# Altium PCB XMOS_MAX3420E.PcbDoc
Units mm, origin at the board's own origin, x right, y up, seen from the top; angles counter-clockwise.
Board outline 25 x 35 mm, 2 copper layers (Top Layer, Bottom Layer); 17 components, 25 nets, 91 pads, 20 vias.
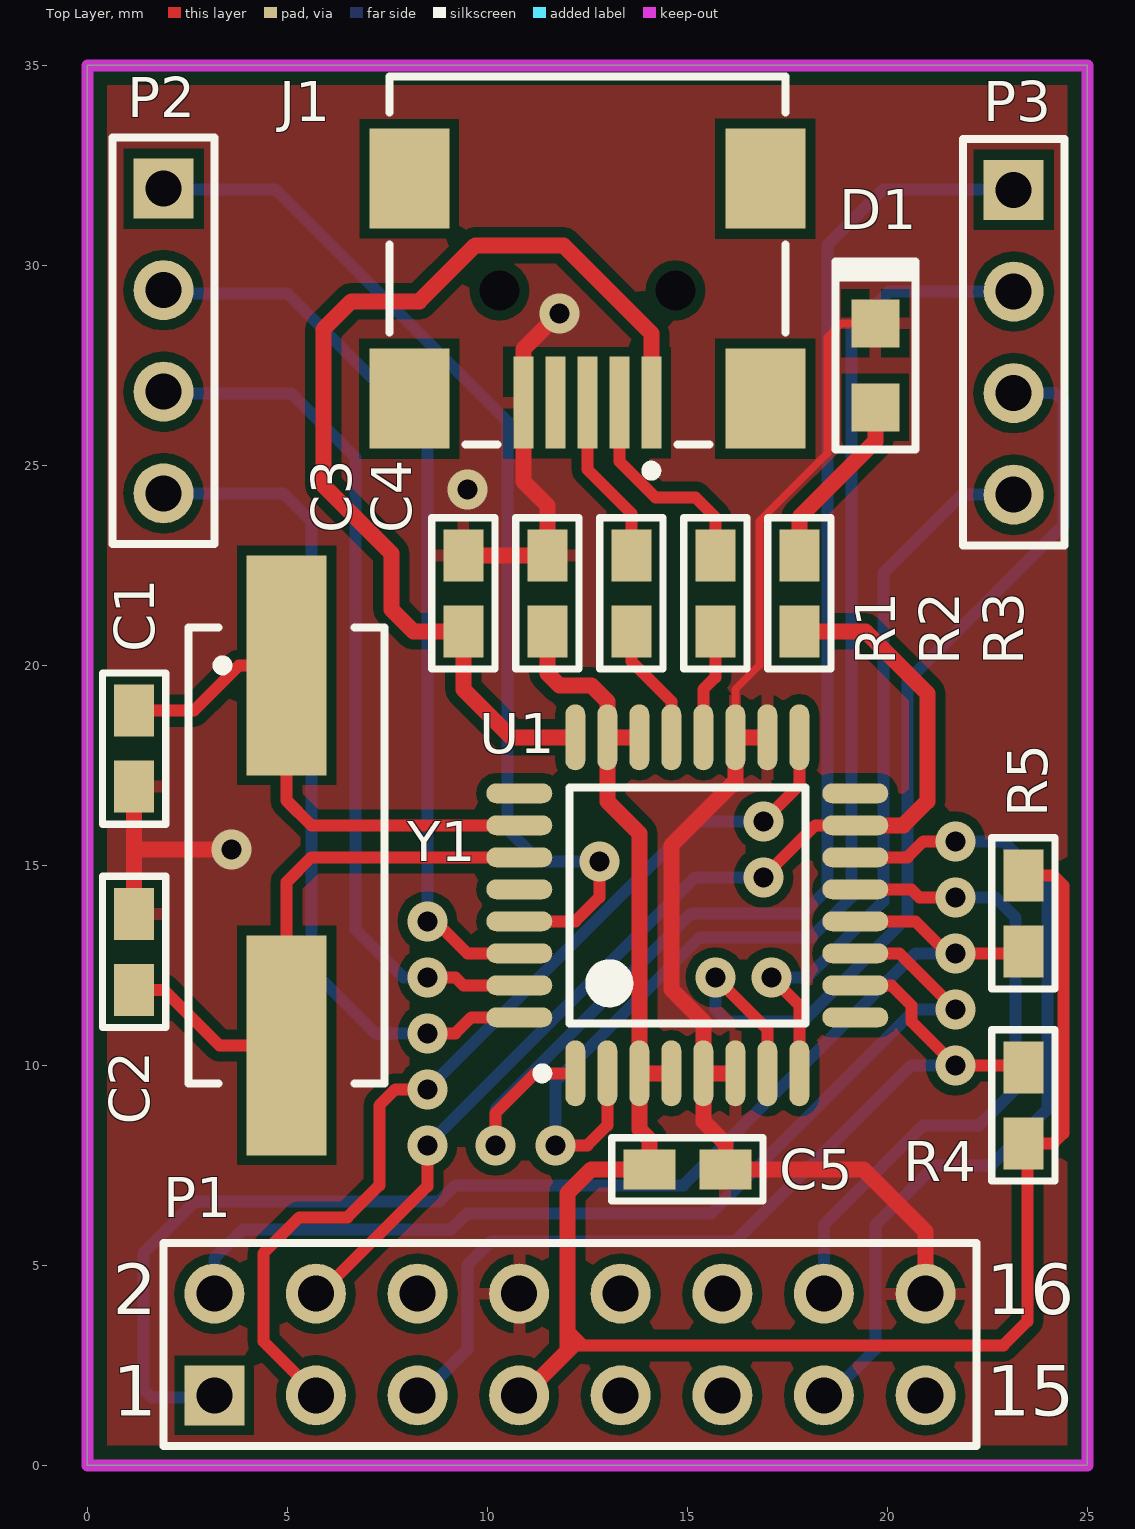
[diagram p0: Top Layer view]
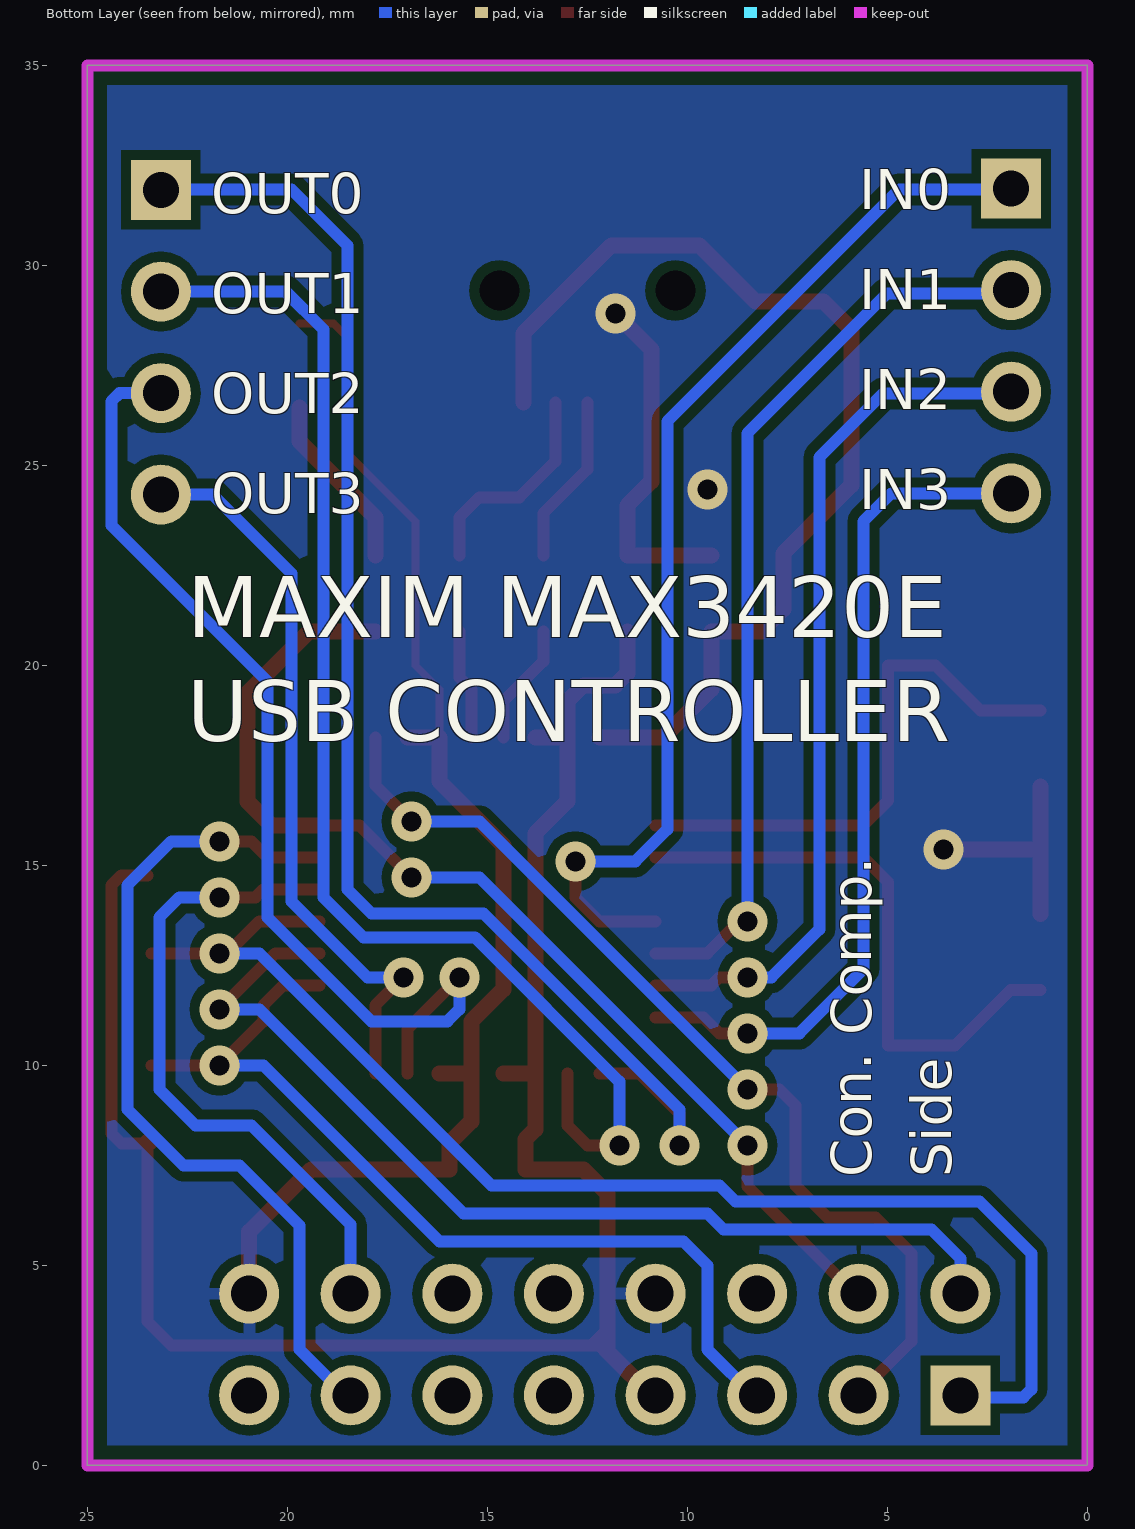
[diagram p1: Bottom Layer view, seen from below]
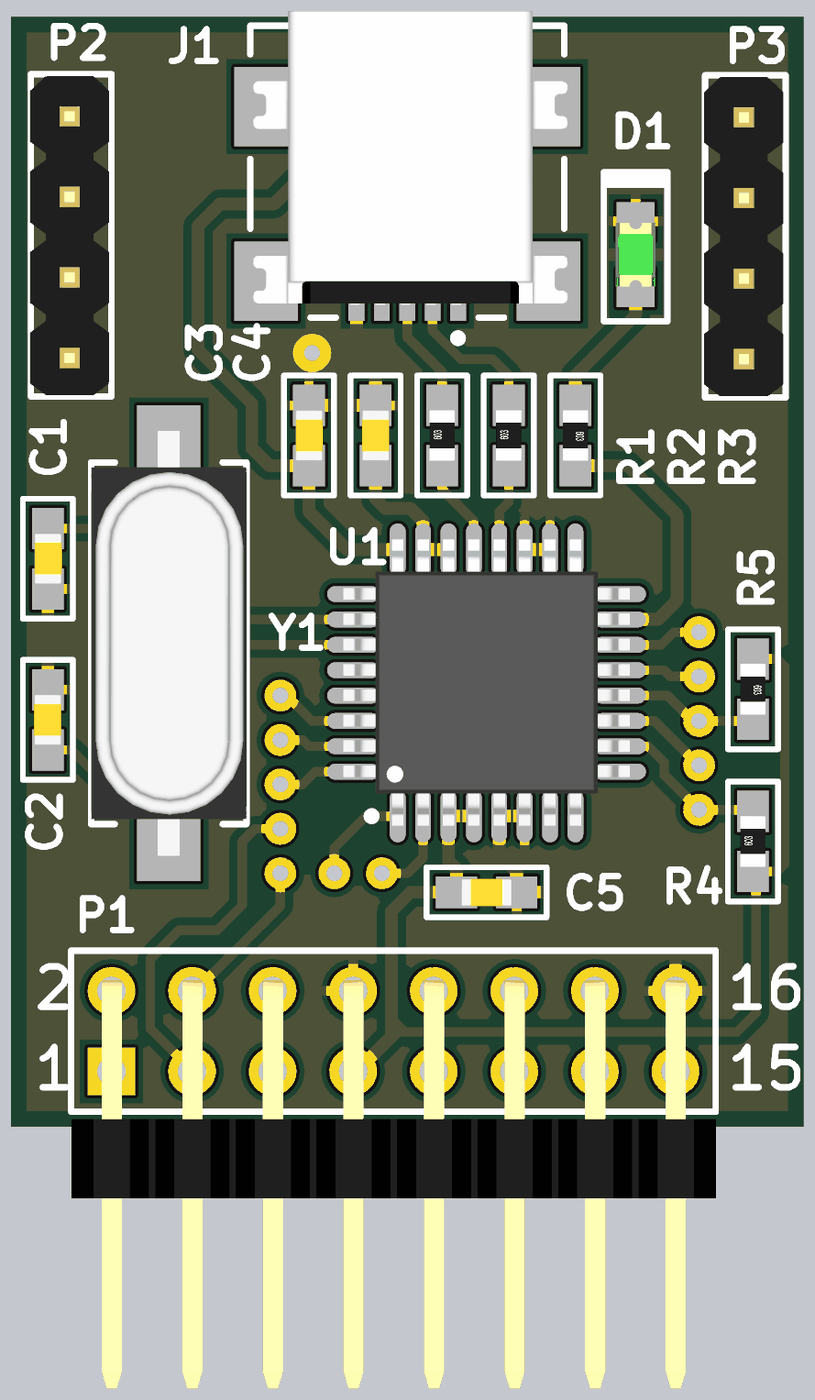
[diagram p2: 3D render of the assembled board from above, using the file's embedded part models]

## Layer stack, top to bottom
Top Layer: signal copper 0.0356
Dielectric: dielectric 0.32, FR-4, Dk 4.8
Bottom Layer: signal copper 0.0356

## Board outline
0,0 25,0 25,35 0,35

## Design rules (kind name [scope] priority, off if disabled: settings)
Clearance Clearance_1 [InPolygon] p1: gap=0.25
Clearance [All] p2: gap=0.2
HoleSize [All] p1: absolutevalues=TRUE maxlimit=2.54 minlimit=0.3 maxpercent=80.000 minpercent=20.000
MinimumSolderMaskSliver [All] p1: minsoldermaskwidth=0.1
PolygonConnect PolygonConnect_4 [IsVia vs IsNamedPolygon('Bottom Layer-GND')] p1: connectstyle=Direct reliefconductorwidth=0.254 reliefentries=4 polygonreliefangle="90 Angle"
PolygonConnect PolygonConnect_3 [IsPad vs IsNamedPolygon('Bottom Layer-GND')] p2: connectstyle=Relief reliefconductorwidth=0.3 reliefentries=4 polygonreliefangle="90 Angle"
PolygonConnect PolygonConnect_2 [IsVia vs IsNamedPolygon('Top Layer-GND')] p3: connectstyle=Direct reliefconductorwidth=0.254 reliefentries=4 polygonreliefangle="90 Angle"
PolygonConnect PolygonConnect_1 [IsPad vs IsNamedPolygon('Top Layer-GND')] p4: connectstyle=Relief reliefconductorwidth=0.3 reliefentries=4 polygonreliefangle="90 Angle"
PolygonConnect [All] p5: connectstyle=Relief reliefconductorwidth=0.254 reliefentries=4 polygonreliefangle="90 Angle"
RoomDefinition XMOS_MAX3420E [InComponentClass('XMOS_MAX3420E')] p1 off: confinementstyle=ConfineIn formatcopy=TRUE lockcomponents=FALSE outline 49.784,0.635 164.084,0.635 164.084,27.686 49.784,27.686
RoutingVias [All] p1: holewidth=0.5 width=1 viastyle="Through Hole" minholewidth=0.5 minwidth=1 maxholewidth=0.711 maxwidth=1.27
SilkToSilkClearance [All] p1: silktosilkclearance=0.1
SilkscreenOverComponentPads [All] p1: minsilkscreentomaskgap=0
SolderMaskExpansion [All] p1: expansion=0.102
Width [All] p1: maxlimit=0.5 minlimit=0.2 preferedwidth=0.2
24 further rules are at their usual default settings.

## Components (designator, comment, footprint, x,y, rotation, side; value= is the part's Value field where it differs from the comment)
C1 "Cap" 1608[0603]_CAP 1.17,17.915 r270 top
C2 "Cap" 1608[0603]_CAP 1.17,12.835 r90 top
C3 "Cap" 1608[0603]_CAP 9.4,21.8 r270 top
C4 "Cap" 1608[0603]_CAP 11.5,21.8 r270 top
C5 "Cap" 1608[0603]_CAP 15,7.4 r180 top
D1 "LED3" 2012[0805]_LED 19.7,27.5 r90 top
J1 "LUMBERG MINI-USB-B" "LUMBERG mini USB-B" 12.5,34.417 r90 top
P1 "Header 8X2" HDR2X8 3.175,1.751 r0 top
P2 "Header 4" HDR1X4 1.905,31.92 r270 top
P3 "Header 4" HDR1X4 23.16,31.885 r270 top
R1 "Res" 1608[0603]_RES 13.6,21.8 r90 top
R2 "Res" 1608[0603]_RES 15.7,21.8 r90 top
R3 "Res" 1608[0603]_RES 17.8,21.8 r270 top
R4 "Res" 1608[0603]_RES 23.4,9 r90 top
R5 "Res" 1608[0603]_RES 23.4,13.8 r270 top
U1 "MAX3420E" TQFP80P900X900-32N 15,14 r90 top
Y1 "XTAL" HC49/4H_SMX 4.98,15.248 r270 top

## Footprints (in the part's own frame and the unit in brackets; to place one, negate y for a bottom-side part, rotate by r counter-clockwise, add the part's x,y. Pads: shape width x height; smd on the part's side, far side on the other; paste and mask are expansions set on the pad)
1608[0603]_CAP [mm] "Chip Resistor / Capacitor; Body 1.6 x 0.8 mm (LxW typ) Handsoldering optimized"
  rect 1.3x1 smd: 1(-0.95,0) 2(0.95,0)
  silkscreen extent -1.89,-0.79 1.89,0.79, body extent -0.8,-0.43 0.8,0.44, height 0.8
1608[0603]_RES [mm] "Chip Resistor / Capacitor; Body 1.6 x 0.8 mm (LxW typ) Handsoldering optimized"
  rect 1.3x1 smd: 1(-0.95,0) 2(0.95,0)
  silkscreen extent -1.89,-0.79 1.89,0.79, body extent -0.8,-0.4 0.8,0.4, height 0.3
2012[0805]_LED [mm] "Kingbright KPHCM-2012SGC-T"
  rect 1.2x1.2 smd: 1(-1.05,0) 2(1.05,0)
  silkscreen extent -2.1,-1 2.6,1, body extent -1.01,-0.62 1.01,0.63, height 1.1
HC49/4H_SMX [mm] "Quartz Crystal, SM; Body 13.4 (inc. leads) x 4.9 mm (LxW max)"
  rect 5.5x2 smd: 1(-4.75,0) 2(4.75,0)
  silkscreen extent -5.7,-2.45 5.7,2.45, body extent -6.7,-2.45 6.7,2.45, height 5.08
HDR1X4 [mm] "Connector; Header; 4 Position"
  rect 1.5x1.5 hole 0.9: 1(0,0)
  round 1.5 hole 0.9: 2(2.54,0) 3(5.08,0) 4(7.62,0)
  silkscreen extent -1.27,-1.27 8.89,1.27, body extent -1.21,-1.3 8.85,1.2, height 8.2
HDR2X8 [mm] "Connector; Header; 8x2 Position"
  rect 1.5x1.5 hole 0.9: 1(0,0)
  round 1.5 hole 0.9: 2(0,2.54) 3(2.54,0) 4(2.54,2.54) 5(5.08,0) 6(5.08,2.54) 7(7.62,0) 8(7.62,2.54) 9(10.16,0) 10(10.16,2.54) 11(12.7,0) 12(12.7,2.54) 13(15.24,0) 14(15.24,2.54) 15(17.78,0) 16(17.78,2.54)
  silkscreen extent -1.27,-1.27 19.05,3.81, body extent -1.26,-10 19.06,2.88, height 2.5
"LUMBERG mini USB-B" [mm] "Connector; USB2.0, Type B, SM; 5 Position; Right Angle"
  rect 2.3x0.5 smd: 1(-7.85,-1.6) 2(-7.85,-0.8) 3(-7.85,0) 4(-7.85,0.8) 5(-7.85,1.6)
  rect 2.5x2 smd: 6(-7.75,4.45) 7(-2.25,4.45) 8(-7.75,-4.45) 9(-2.25,-4.45)
  round 0.6 hole 1 unplated: MH1(-5.05,2.2) MH2(-5.05,-2.2)
  silkscreen extent -9.67,-4.95 0.3,4.95, body extent -8.5,-5.05 0.75,4.85, height 3.93
TQFP80P900X900-32N [mm] "Thin QFP, 32-Leads, Body 7x7mm, Pitch 0.8mm, IPC Medium Density"
  oval 1.65x0.5 smd: 1(-4.2,2.8) 2(-4.2,2) 3(-4.2,1.2) 4(-4.2,0.4) 5(-4.2,-0.4) 6(-4.2,-1.2) 7(-4.2,-2) 8(-4.2,-2.8) 17(4.2,-2.8) 18(4.2,-2) 19(4.2,-1.2) 20(4.2,-0.4) 21(4.2,0.4) 22(4.2,1.2) 23(4.2,2) 24(4.2,2.8)
  oval 0.5x1.65 smd: 9(-2.8,-4.2) 10(-2,-4.2) 11(-1.2,-4.2) 12(-0.4,-4.2) 13(0.4,-4.2) 14(1.2,-4.2) 15(2,-4.2) 16(2.8,-4.2) 25(2.8,4.2) 26(2,4.2) 27(1.2,4.2) 28(0.4,4.2) 29(-0.4,4.2) 30(-1.2,4.2) 31(-2,4.2) 32(-2.8,4.2)
  silkscreen extent -4.32,-2.95 2.95,3.75, body extent -4.5,-4.51 4.52,4.51, height 1.35

## Part data
C1 C2 C3 C4 C5: "Capacitor"
D1: "SMD LED 0805"
J1: "USB 2.0, Right Angle, SMT, A Type, Receptacle, 5 Position, Black"
P1: "Header, 8-Pin, Dual row"
P2 P3: "Header, 4-Pin"
R1 R2 R3 R4 R5: "Resistor"
U1: "USB Controller SPI Interface"
Y1: "Crystal Oscillator"

## Via types
v1: diameter 1, hole 0.5, Top Layer to Bottom Layer, 20 vias

## Nets (pads, with @x,y where several pads share a name; then routed paths per layer and width w, separated by ;. In a path a pad name is that pad's centre, name@x,y a point inside that pad or via, vN(x,y) a via of type N, cw(c..) or ccw(c..) an arc to the next point about the centre after c; other vN are vias at no path point)
D33: C4.2 C5.2 P1.7 R4.1 R5.1 U1.3 U1.4 U1.22 U1.23 | length 49.8
  Top Layer w0.3: 12,3.4 12.4,3 ; 12.144,3 12.4,3 ; R4.1 R4.1@23.5,8.05 ; R5.1@23.5,14.75 24.15,14.75 24.4,14.5 24.4,8.3 24.15,8.05 R4.1@23.5,8.05 ; R4.1@23.55,8.1 23.5,8.15 R4.1@23.5,8.05 ; 12.4,3 22.9,3 23.5,3.6 R4.1@23.5,8.05
  Top Layer w0.4: P1.7@10.795,1.651 12,2.856 ; C4.2 11.5,19.8 11.8,19.5 12.6,19.5 13,19.1 U1.23 ; 12.144,3 12,2.856 ; U1.22 U1.23 ; U1.4 U1.3 ; 12,2.856 12,3.4 12,6.8 12.6,7.4 C5.2 14.05,8.15 13.8,8.4 U1.3 ; U1.23 13,16.6 13.8,15.8 U1.3
GND: C1.2 C2.2 C3.1 C4.1 C5.1 D1.2 J1.5 P1.8 P1.16 U1.5 U1.6 U1.18 U1.19 | length 47.5
  Top Layer w0.2: U1.19 16.2,19.4 16.8,20 16.8,23.6 18.5,25.3 18.5,28.2 18.85,28.55 D1.2
  Top Layer w0.4: C2.2 1.17,15.4 ; C1.2 1.17,15.4 ; v1(3.6,15.4) 1.17,15.4 ; C3.1 C4.1 11.5,24 10.9,24.6 J1.5 10.9,27.9 v1(11.8,28.8) ; U1.6 U1.5 ; U1.18 U1.19 16.2,17.1 14.6,15.5 14.6,11.9 15.4,11.1 U1.5 ; P1.16 20.955,5.845 19.4,7.4 C5.1 15.95,8.05 15.4,8.6 U1.5
  other v1: 9.5,24.4
GPX: P1.4 R3.2 U1.15 | length 27.6
  Top Layer w0.3: P1.4@5.715,4.191 8.5,6.976 v1(8.5,8) ; v1@16.95,14.65 16.95,14.75 18.2,16 U1.15
  Top Layer w0.4: R3.2 19.45,20.85 21,19.3 21,16.6 20.4,16 U1.15
  Bottom Layer w0.3: v1(8.5,8) 15.2,14.7 16.7,14.7 16.8,14.6 v1@16.9,14.6
  other v1: 16.9,14.7
IN0: P2.1 U1.29 | length 27
  Top Layer w0.3: U1.29 12.2,13.6 12.8,14.2 v1(12.8,15.1)
  Bottom Layer w0.3: P2.1@1.905,31.9 4.7,31.9 10.5,26.1 10.5,15.9 11.3,15.1 v1(12.8,15.1)
IN1: P2.2 U1.30 | length 22.9
  Top Layer w0.3: v1(8.5,13.6) 8.7,13.6 9.5,12.8 U1.30
  Bottom Layer w0.3: P2.2@1.905,29.3 5,29.3 8.5,25.8 v1(8.5,13.6)
IN2: P2.3 U1.31 | length 22
  Top Layer w0.3: v1(8.5,12.2) 9.2,12.2 9.4,12 U1.31
  Bottom Layer w0.3: P2.3@1.905,26.9 2.005,26.8 5.1,26.8 6.7,25.2 6.7,13.4 7.9,12.2 v1(8.5,12.2)
IN3: P2.4 U1.32 | length 21.2
  Top Layer w0.3: v1(8.5,10.8) 9.2,10.8 9.6,11.2 U1.32
  Bottom Layer w0.3: P2.4 4.9,24.3 5.6,23.6 5.6,12.4 7.2,10.8 v1(8.5,10.8)
INT: P1.3 U1.17 | length 24.8
  Top Layer w0.3: P1.3@5.715,1.651 5.715,1.785 4.4,3.1 4.4,5.3 5.3,6.2 6.5,6.2 7.3,7 7.3,9 7.7,9.4 v1(8.5,9.4) ; v1(16.9,16.1) 17.8,17 U1.17
  Bottom Layer w0.3: v1(8.5,9.4) 15.2,16.1 v1(16.9,16.1)
MISO: P1.14 U1.13 | length 16.6
  Top Layer w0.3: U1.13 20.6,14.4 20.8,14.2 v1(21.7,14.2)
  Bottom Layer w0.3: P1.14@18.415,4.191 18.415,6.015 20.9,8.5 22.3,8.5 23.2,9.4 23.2,13.7 22.7,14.2 v1(21.7,14.2)
MOSI: P1.13 U1.14 | length 21.4
  Top Layer w0.3: U1.14 20.5,15.2 20.9,15.6 v1(21.7,15.6)
  Bottom Layer w0.3: P1.13@18.415,1.651 18.451,1.651 19.7,2.9 19.7,6 21.2,7.5 22.6,7.5 24,8.9 24,14.5 22.9,15.6 v1(21.7,15.6)
NetC1_1: C1.1 U1.26 Y1.1 | length 13.7
  Top Layer w0.3: C1.1 2.665,18.865 3.798,19.998 Y1.1 4.98,16.62 5.6,16 U1.26
NetC2_1: C2.1 U1.27 Y1.2 | length 14.5
  Top Layer w0.3: C2.1 1.915,11.885 3.302,10.498 Y1.2 4.98,14.58 5.6,15.2 U1.27
NetD1_1: D1.1 R3.1 | length 4.5
  Top Layer w0.4: R3.1 17.8,23.7 19.7,25.6 D1.1
NetJ1_2: J1.2 R2.2 | length 5.4
  Top Layer w0.3: J1.2 13.3,25.1 14.2,24.2 15.2,24.2 15.7,23.7 R2.2
NetJ1_3: J1.3 R1.2 | length 4.3
  Top Layer w0.3: J1.3 12.5,24.9 13.6,23.8 R1.2
NetR1_1: R1.1 U1.21 | length 3.1
  Top Layer w0.3: R1.1 13.6,20.1 14.6,19.1 U1.21
NetR2_1: R2.1 U1.20 | length 2.8
  Top Layer w0.3: U1.20 15.4,19.4 15.7,19.7 R2.1
OUT0: P3.1 U1.1 | length 36
  Top Layer w0.3: v1(10.2,8) 10.2,8.8 11.2,9.8 U1.1
  Bottom Layer w0.3: v1(10.2,8) 10.2,8.9 15.1,13.8 17.9,13.8 18.5,14.4 18.5,30.5 19.9,31.9 P3.1@23.16,31.9
OUT1: P3.2 U1.2 | length 32.2
  Top Layer w0.3: v1@11.824,8 12.5,8 13,8.5 U1.2
  Bottom Layer w0.3: v1(11.7,8) 11.7,9.593 15.307,13.2 18.1,13.2 19.1,14.2 19.1,28.4 20.045,29.345 P3.2
OUT2: P3.3 U1.7 | length 25.5
  Top Layer w0.3: v1@15.7,12 15.9,12 17,10.9 U1.7
  Bottom Layer w0.3: v1(15.7,12.2) 15.7,11.4 16,11.1 17.9,11.1 20.5,13.7 20.5,19.6 24.4,23.5 24.4,26.6 24.195,26.805 P3.3
OUT3: P3.4 U1.8 | length 18.6
  Top Layer w0.3: v1(17.1,12.2) 17.8,11.5 U1.8
  Bottom Layer w0.3: v1(17.1,12.2) 18,12.2 19.9,14.1 19.9,22.3 21.865,24.265 P3.4
RES: P1.5 R4.2 U1.10 | length 23.3
  Top Layer w0.3: U1.10 20.1,12 20.6,11.5 20.6,11.1 v1(21.7,10) R4.2@23.4,10
  Bottom Layer w0.3: P1.5@8.305,1.701 9.5,2.896 9.5,5 10.1,5.6 16.2,5.6 20.6,10 v1(21.7,10)
SCK: P1.2 U1.11 | length 25
  Top Layer w0.3: U1.11 20.3,12.8 21.6,11.5 v1@21.7,11.5
  Bottom Layer w0.3: P1.2 3.175,5.175 3.9,5.9 9.1,5.9 9.5,6.3 15.6,6.3 20.7,11.4 v1(21.7,11.4)
SS: P1.1 R5.2 U1.12 | length 33.3
  Top Layer w0.3: U1.12 20.7,13.6 21.5,12.8 v1(21.7,12.8) R5.2@23.4,12.8
  Bottom Layer w0.3: P1.1@3.175,1.651 3.126,1.7 1.6,1.7 1.4,1.9 1.4,5.3 2.7,6.6 8.8,6.6 9.2,7 14.9,7 20.7,12.8 v1(21.7,12.8) v1@21.65,12.85
VBUS: C3.2 J1.1 U1.24 | length 26.2
  Top Layer w0.4: U1.24 10.6,18.2 9.4,19.4 C3.2 8.15,20.85 7.6,21.4 7.6,22.8 5.9,24.5 5.9,28.4 6.6,29.1 8.3,29.1 9.7,30.5 11.9,30.5 14.1,28.3 J1.1
pads on no net: J1.4 J1.6 J1.7 J1.8 J1.9 J1.MH1 J1.MH2 P1.6 P1.9 P1.10 P1.11 P1.12 P1.15 U1.9 U1.16 U1.25 U1.28

## Polygon pours and split planes (outlines as drawn)
GND on Top Layer "Top Layer-GND" (solid, remove dead copper, pour order 2): 0.5,0.5 0.5,34.5 24.5,34.5 24.5,0.5
GND on Bottom Layer "Bottom Layer-GND" (solid, remove dead copper, pour order 4): 0.5,0.5 0.5,34.5 24.5,34.5 24.5,0.5

## Keep-outs
Keep-Out Layer:
  the board outline again, w0.3

## Silkscreen, mask and mechanical layers (free items; w line width, h text height)
Bottom Overlay:
  text "IN0" at 5.7,31.4 h1
  text "OUT0" at 21.9,31.3 h1
  text "IN1" at 5.7,28.9 h1
  text "OUT1" at 21.9,28.8 h1
  text "IN2" at 5.7,26.4 h1
  text "OUT2" at 21.9,26.3 h1
  text "IN3" at 5.7,23.9 h1
  text "OUT3" at 21.9,23.8 h1
  text "MAXIM MAX3420E" at 22.5,20.7 h1.52
  text "USB CONTROLLER" at 22.5,18.1 h1.52
  text "Side" at 3.4,7.2 h1 r270
  text "Con. Comp." at 5.4,7.2 h1 r270
Mechanical 1:
  the board outline again, w0.3
Drill Drawing:
  text ".LEGEND" at 30.08,5.08 h1.52
  text "Drill Drawing." at 30.08,2.54 h1.52

## Dimensions
0,0 to 0,35 on Mechanical 1
0,0 to 25,0 on Mechanical 1

## Text inside footprints (layer, text, board x,y; h text height)
P1: Top Overlay "2" at 0.635,3.783 h1.27; Top Overlay "1" at 0.635,1.243 h1.27; Top Overlay "15" at 22.479,1.243 h1.27; Top Overlay "16" at 22.479,3.783 h1.27